# Altium PCB Pcb.PcbDoc
Units mm, origin at the board's own origin, x right, y up, seen from the top; angles counter-clockwise.
Board outline 90 x 90 mm, 2 copper layers (Top Layer, Bottom Layer); 37 components, 25 nets, 181 pads, 18 vias.
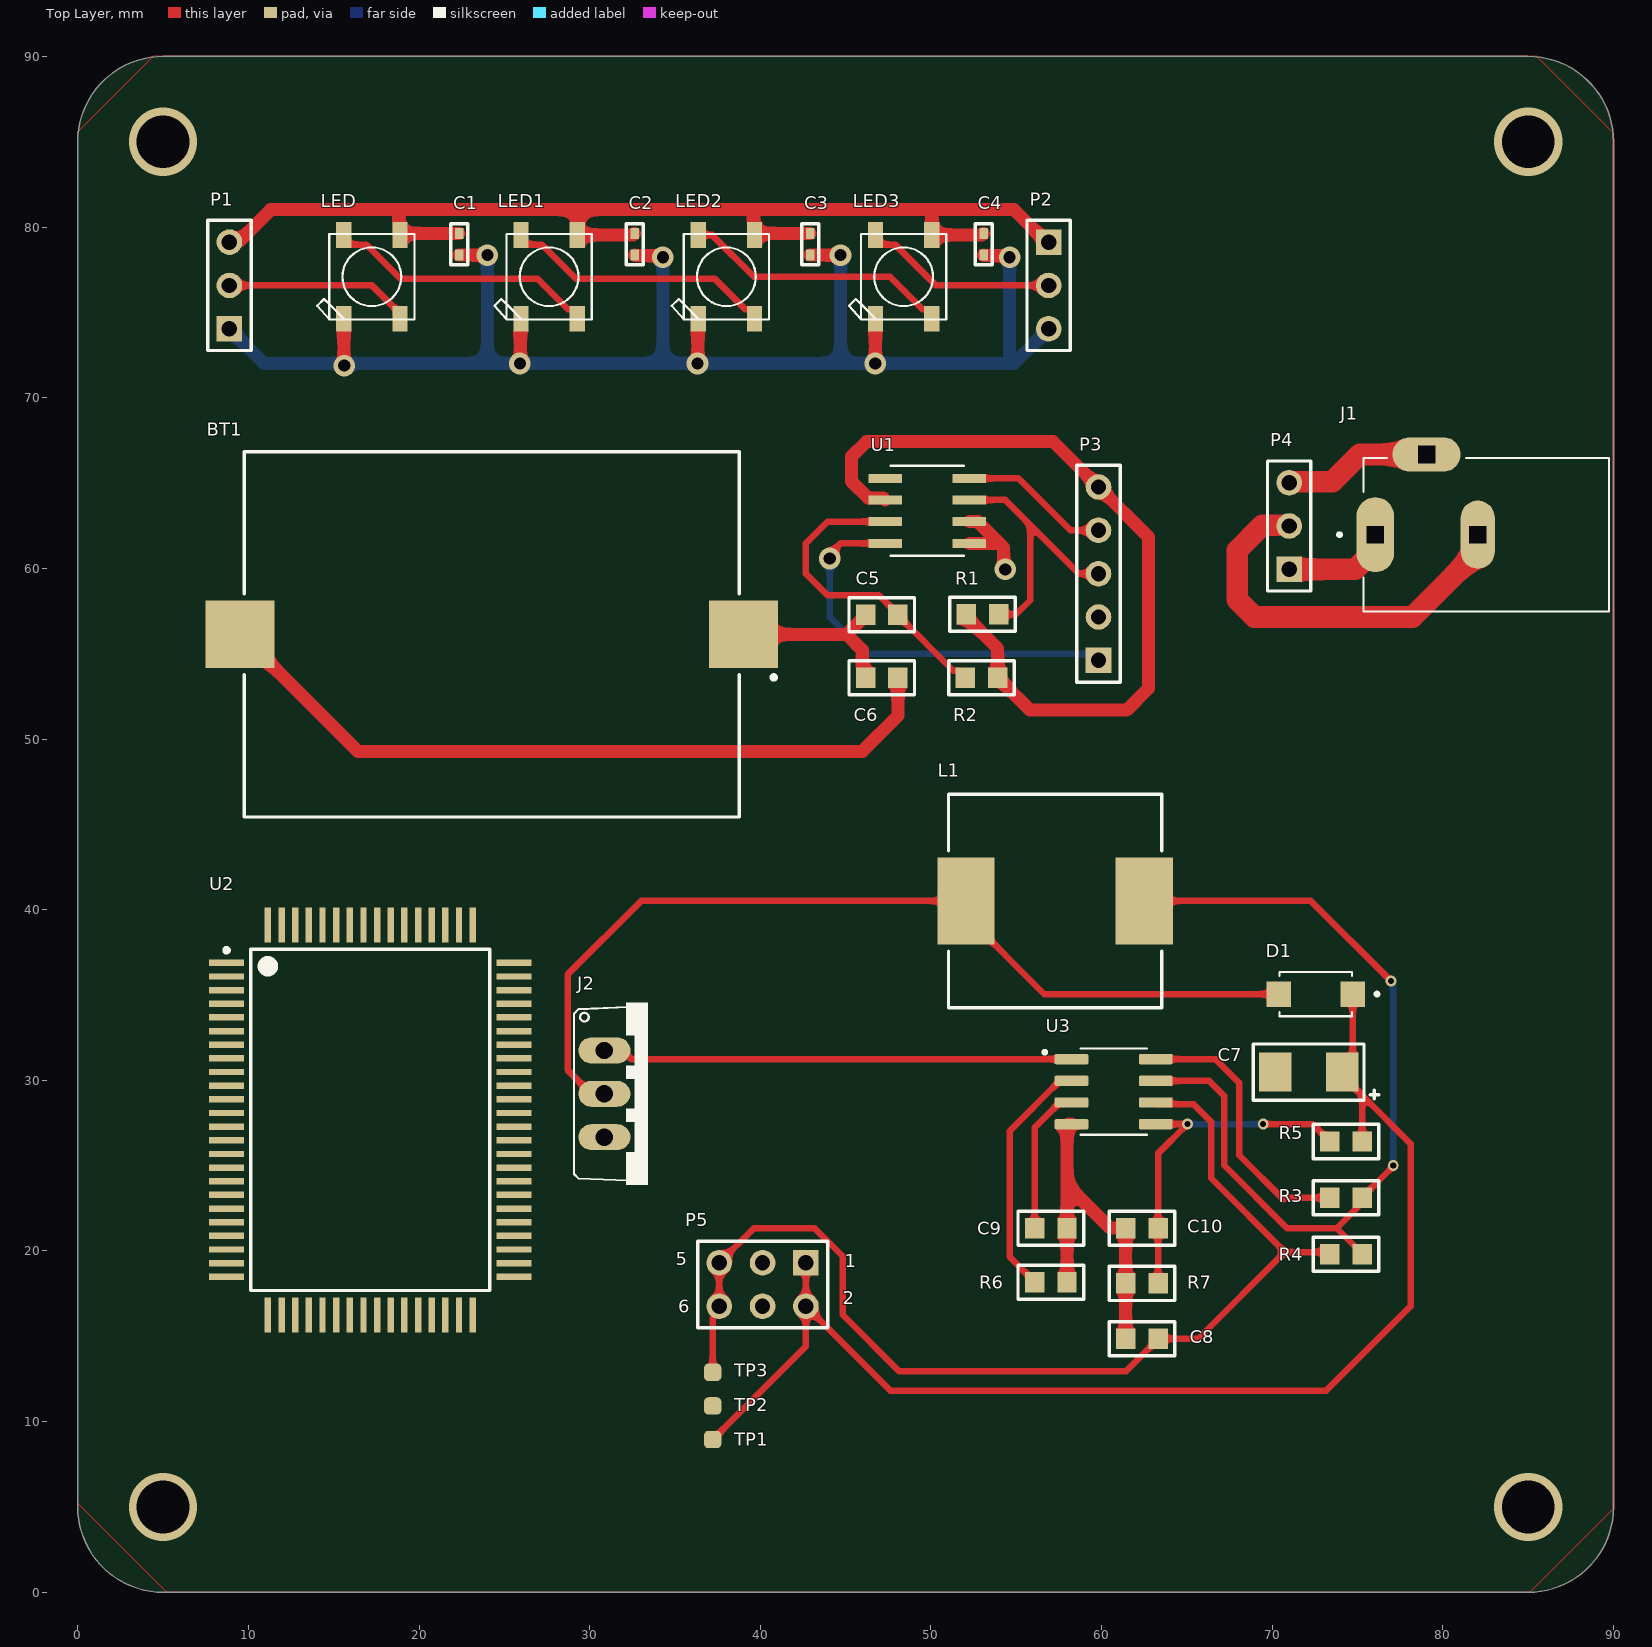
[diagram p0: Top Layer view]
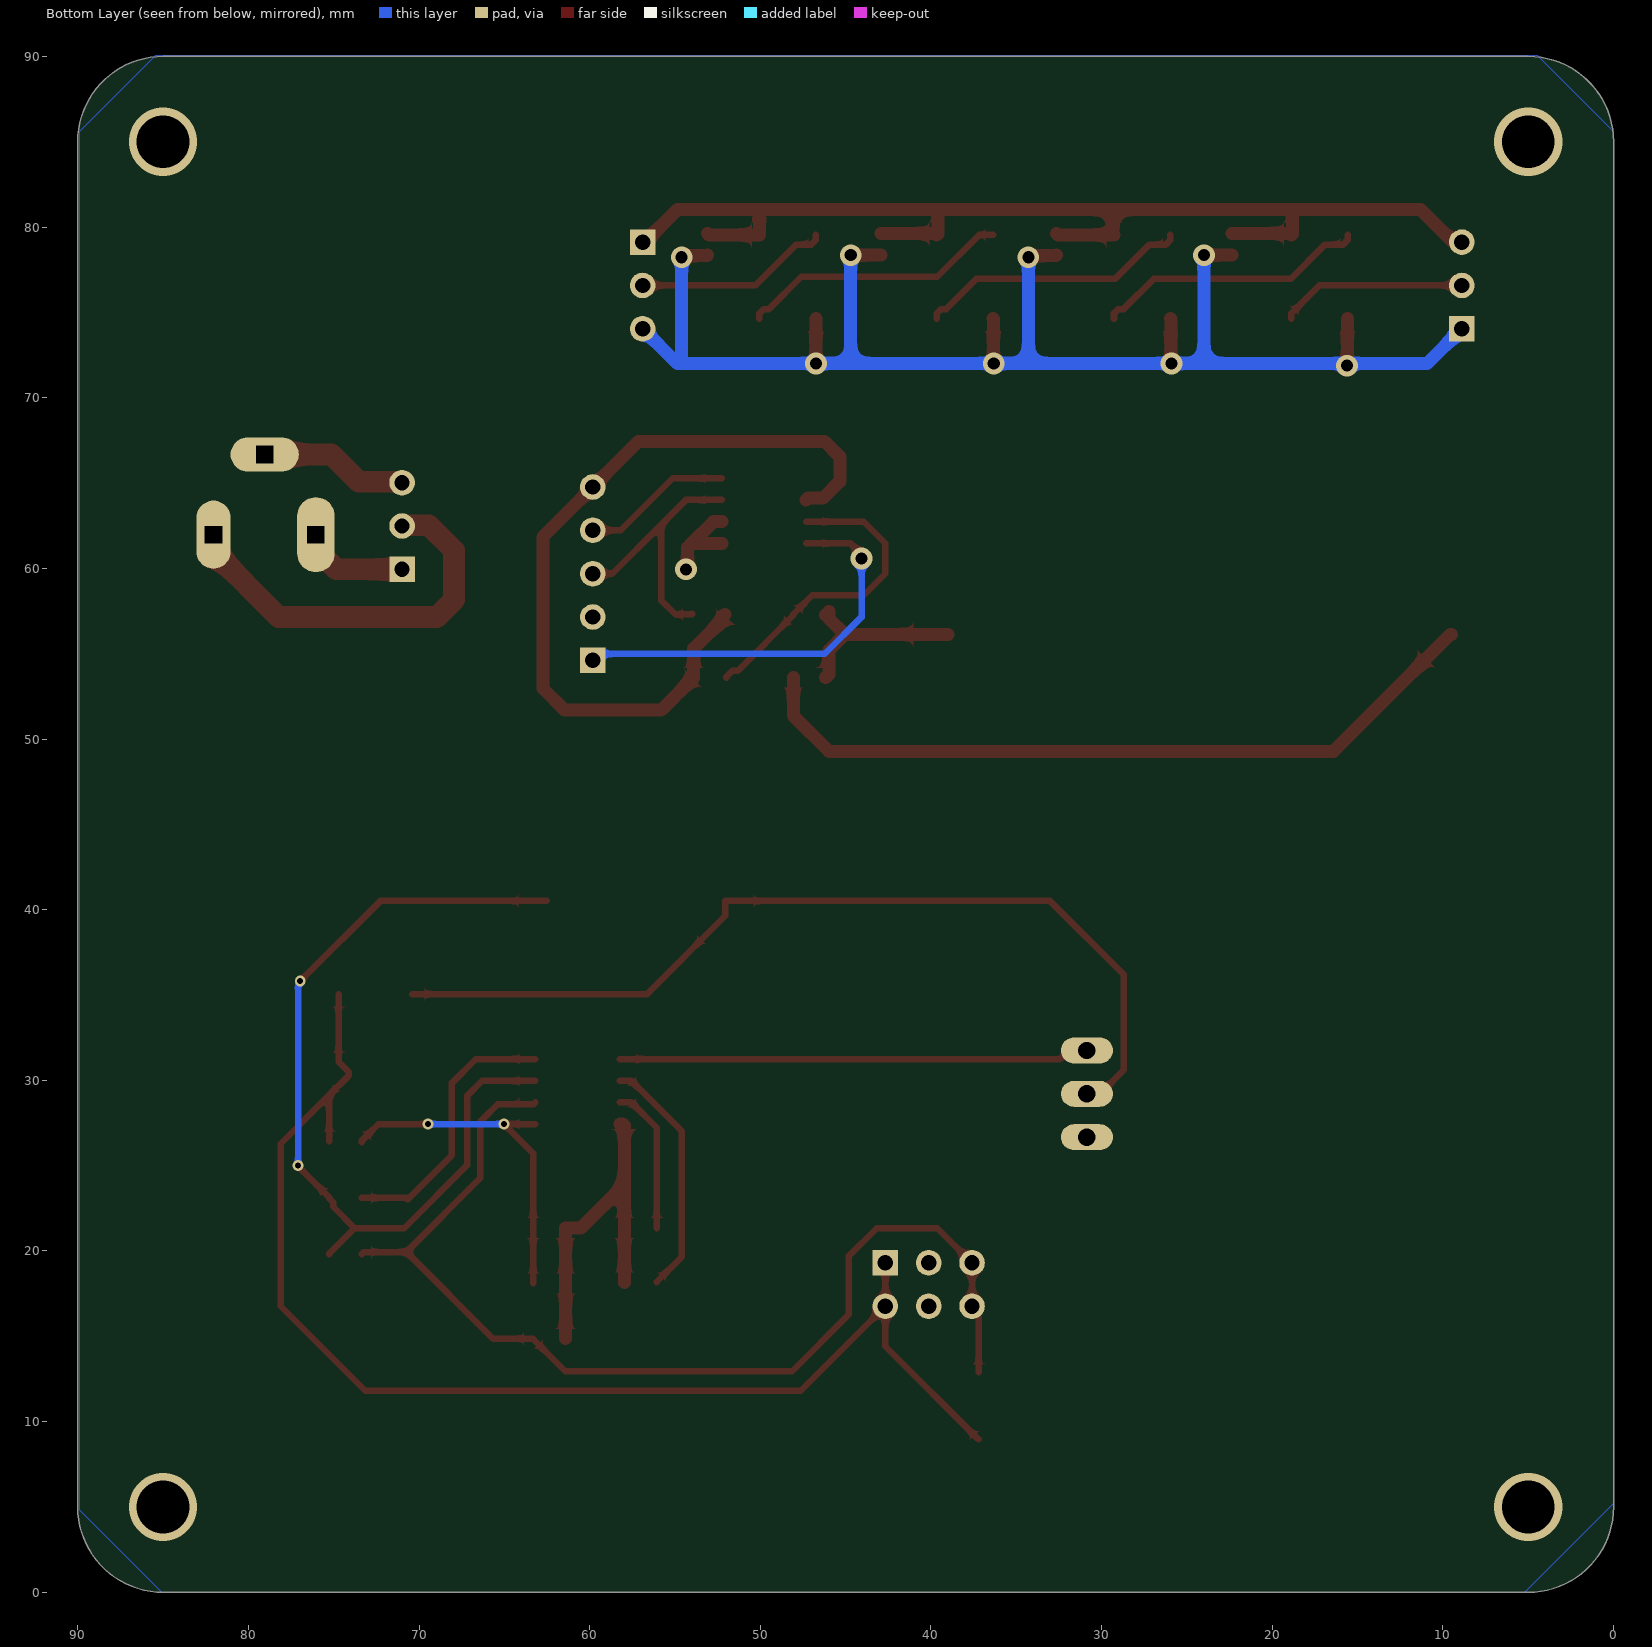
[diagram p1: Bottom Layer view, seen from below]

## Layer stack, top to bottom
Top Solder: solder mask 0.0102, Solder Resist, Dk 3.5
Top Layer: signal copper 0.0356
Dielectric 1: dielectric 0.32, FR-4, Dk 4.8
Bottom Layer: signal copper 0.0356
Bottom Solder: solder mask 0.0102, Solder Resist, Dk 3.5

## Board outline
0,5 0,85 cw(c5,85) 5,90 85,90 cw(c85,85) 90,85 90,5 cw(c85,5) 85,0 5,0 cw(c5,5)

## Design rules (kind name [scope] priority, off if disabled: settings)
Clearance [All] p1: gap=0.254 ignorepadtopadclearanceinfootprint=FALSE except(0: Arc-Hole Track-Hole SMDPad-Hole THPad-Hole Via-Hole Fill-Hole Poly-Hole Region-Hole Text-Hole)
PolygonConnect [All] p1: connectstyle=Relief reliefconductorwidth=0.254 reliefentries=4 polygonreliefangle="90 Angle" airgapwidth=0.254
RoutingVias [All] p1: holewidth=0.711 width=1.27 viastyle="Through Hole" minholewidth=0.356 minwidth=0.635 maxholewidth=4.5 maxwidth=5
SolderMaskExpansion [All] p1: expansion=0.102
Width [All] p1: maxlimit=2.54 minlimit=0.254 preferedwidth=0.254
30 further rules are at their usual default settings.

## Components (designator, comment, footprint, x,y, rotation, side; value= is the part's Value field where it differs from the comment)
BT1 "CR2032 BS-10" "CR2032 BS-10" 24.257,56.134 r180 top
C1 "Capacitor" 0402 22.352,78.994 r270 top
C2 "Capacitor" 0402 32.639,78.994 r270 top
C3 "Capacitor" 0402 42.926,78.994 r270 top
C4 "Capacitor" 0402 53.086,78.994 r270 top
C5 "104" 0805 47.117,57.277 r0 top
C6 "104" 0805 47.117,53.594 r180 top
C7 "4.7uF/250V" "1808 Polarized" 72.136,30.48 r180 top
C8 "100nF" 0805 62.357,14.859 r180 top
C9 "1nF" 0805 57.023,21.336 r180 top
C10 "100nF" 0805 62.357,21.336 r180 top
D1 "RS1MAL" SODFL5226X100N 72.553,35.052 r180 top
J1 "DC-005-5A-2.0" XKB_DC-005-5A-2.0 82.042,61.976 r180 top
J2 "IRF630" TO220V 33.401,29.21 r270 top
L1 "330uH" INDP125125X80N 57.277,40.513 r180 top
LED "WS2812B" WS2812B 17.235,77.089 r90 top
LED1 "WS2812B" WS2812B 27.624,77.089 r90 top
LED2 "WS2812B" WS2812B 38.012,77.089 r90 top
LED3 "WS2812B" WS2812B 48.401,77.089 r90 top
P1 "Header 3" HDR1X3 8.89,74.041 r90 top
P2 "Header 3" HDR1X3 56.896,79.121 r270 top
P3 "Header 5" HDR1X5 59.817,54.61 r90 top
P4 "Header 3" HDR1X3 70.993,59.944 r90 top
P5 "Header 3X2" HDR2X3 42.672,19.304 r180 top
R1 "10K" 0805 53.025,57.307 r180 top
R2 "10K" 0805 52.959,53.594 r0 top
R3 "100" 0805 74.318,23.114 r0 top
R4 "0.33" 0805 74.318,19.812 r0 top
R5 "1.1M" 0805 74.318,26.416 r180 top
R6 "330" 0805 57.023,18.161 r180 top
R7 "8.2K" 0805 62.357,18.098 r0 top
TP1 "" Test-Point-SMD 37.211,8.954 r90 top
TP2 "" Test-Point-SMD 37.211,10.922 r90 top
TP3 "" Test-Point-SMD 37.211,12.89 r90 top
U1 "DS3231MZVT" DS3231 49.784,63.373 r0 top
U2 "HV57708PG-G" HV57708 17.145,27.686 r0 top
U3 "MC34063ADR" MC34063ADR 60.706,29.337 r0 top

## Footprints (in the part's own frame and the unit in brackets; to place one, negate y for a bottom-side part, rotate by r counter-clockwise, add the part's x,y. Pads: shape width x height; smd on the part's side, far side on the other; paste and mask are expansions set on the pad)
0402 [mm]
  rect 0.635x0.5 smd: 1(-0.635,0) 2(0.635,0)
  silkscreen extent -1.2,-0.5 1.2,0.5, body extent -0.5,-0.25 0.5,0.25, height 0.32
0805 [mm]
  rect 1.14x1.2 smd: 1(-0.95,0) 2(0.95,0)
  silkscreen extent -1.92,-1 1.92,1, body extent -1,-0.6 1,0.6, height 0.45
"1808 Polarized" [mil]
  rect 75x90 smd: 1(-77.5,0) 2(77.5,0)
  silkscreen extent -162,-65 128,65
"CR2032 BS-10" [mm] "SODFL, 2-Leads, Body 21.44x33.00mm, IPC Medium Density"
  rect 4.05x3.95 smd: 1(-14.75,0) 2(14.75,0)
  silkscreen extent -16.65,-10.7 14.5,10.7, body extent -14.48,-10.72 14.48,10.72, height 5.1
DS3231 [mil]
  rect 78x21 smd: 1(-97,75) 2(-97,25) 3(-97,-25) 4(-97,-75) 5(97,-75) 6(97,-25) 7(97,25) 8(97,75)
  silkscreen extent -84,-104 84,104
HDR1X3 [mm] "Connector; Header; 3 Position"
  rect 1.5x1.5 hole 0.9: 1(0,0)
  round 1.5 hole 0.9: 2(2.54,0) 3(5.08,0)
  silkscreen extent -1.27,-1.27 6.35,1.27
HDR1X5 [mm] "Connector; Header; 5 Position"
  rect 1.5x1.5 hole 0.9: 1(0,0)
  round 1.5 hole 0.9: 2(2.54,0) 3(5.08,0) 4(7.62,0) 5(10.16,0)
  silkscreen extent -1.27,-1.27 11.43,1.27
HDR2X3 [mm] "Connector; Header; 3x2 Position"
  rect 1.5x1.5 hole 0.9: 1(0,0)
  round 1.5 hole 0.9: 2(0,2.54) 3(2.54,0) 4(2.54,2.54) 5(5.08,0) 6(5.08,2.54)
  silkscreen extent -1.27,-1.27 6.35,3.81
HV57708 [mm] "QFP, 80-Leads, Body 14.00x20.00mm, Pitch 0.80mm, IPC Medium Density"
  rect 2.05x0.375 smd: 1(-8.425,9.2) 2(-8.425,8.4) 3(-8.425,7.6) 4(-8.425,6.8) 5(-8.425,6) 6(-8.425,5.2) 7(-8.425,4.4) 8(-8.425,3.6) 9(-8.425,2.8) 10(-8.425,2) 11(-8.425,1.2) 12(-8.425,0.4) 13(-8.425,-0.4) 14(-8.425,-1.2) 15(-8.425,-2) 16(-8.425,-2.8) 17(-8.425,-3.6) 18(-8.425,-4.4) 19(-8.425,-5.2) 20(-8.425,-6) 21(-8.425,-6.8) 22(-8.425,-7.6) 23(-8.425,-8.4) 24(-8.425,-9.2) 41(8.425,-9.2) 42(8.425,-8.4) 43(8.425,-7.6) 44(8.425,-6.8) 45(8.425,-6) 46(8.425,-5.2) 47(8.425,-4.4) 48(8.425,-3.6) 49(8.425,-2.8) 50(8.425,-2) 51(8.425,-1.2) 52(8.425,-0.4) 53(8.425,0.4) 54(8.425,1.2) 55(8.425,2) 56(8.425,2.8) 57(8.425,3.6) 58(8.425,4.4) 59(8.425,5.2) 60(8.425,6) 61(8.425,6.8) 62(8.425,7.6) 63(8.425,8.4) 64(8.425,9.2)
  rect 0.375x2.05 smd: 25(-6,-11.425) 26(-5.2,-11.425) 27(-4.4,-11.425) 28(-3.6,-11.425) 29(-2.8,-11.425) 30(-2,-11.425) 31(-1.2,-11.425) 32(-0.4,-11.425) 33(0.4,-11.425) 34(1.2,-11.425) 35(2,-11.425) 36(2.8,-11.425) 37(3.6,-11.425) 38(4.4,-11.425) 39(5.2,-11.425) 40(6,-11.425) 65(6,11.425) 66(5.2,11.425) 67(4.4,11.425) 68(3.6,11.425) 69(2.8,11.425) 70(2,11.425) 71(1.2,11.425) 72(0.4,11.425) 73(-0.4,11.425) 74(-1.2,11.425) 75(-2,11.425) 76(-2.8,11.425) 77(-3.6,11.425) 78(-4.4,11.425) 79(-5.2,11.425) 80(-6,11.425)
  silkscreen extent -8.55,-10 7,10.06, body extent -7,-10 7,10, height 3.1
INDP125125X80N [mm] "Precision Wire Wound Inductor, 2-Leads, Body 12.50x12.50mm, IPC Medium Density"
  rect 3.35x5.1 smd: 1(-5.225,0) 2(5.225,0)
  silkscreen extent -6.25,-6.25 6.25,6.25, body extent -6.25,-6.25 6.25,6.25, height 8
MC34063ADR [mm]
  rrect25% 1.97x0.6 smd: 1(-2.47,1.905) 2(-2.47,0.635) 3(-2.47,-0.635) 4(-2.47,-1.905) 5(2.47,-1.905) 6(2.47,-0.635) 7(2.47,0.635) 8(2.47,1.905)
  silkscreen extent -4.14,-2.52 1.95,2.52
SODFL5226X100N [mm]
  rect 1.44x1.48 smd: 1(-2.165,0) 2(2.165,0)
  silkscreen extent -3.68,-1.3 2.12,1.3, body extent -2.6,-1.3 2.6,1.3, height 1
Test-Point-SMD [mil]
  rrect50% 40x40 smd: 1(0,0)
TO220V [mil]
  oval 60x120 hole 40: 1(-100,-100) 2(0,-100) 3(100,-100)
  silkscreen extent -210,-170 210,0, body extent -202,-88 202,88, height 750
WS2812B [mm]
  rect 1.5x0.9 smd: 1-VDD(2.45,-1.65) 2-DOUT(2.45,1.65) 3-GND(-2.45,1.65) 4-DIN(-2.45,-1.65)
  silkscreen extent -2.5,-2.5 2.5,3.2
XKB_DC-005-5A-2.0 [mm]
  oval 2.2x4.4 hole 1 square: 1(6,0)
  oval 2x4 hole 1 square: 2(0,0)
  oval 4x2 hole 1 square: 3(3,-4.7)
  silkscreen extent -7.7,-4.5 8.2,4.5

## Part data
C5 C6 C8 C9 C10: library part Capacitor
C7: library part CapacitorPolarized
D1: "1A, 200V - 1000V Fast Recovery Surface Mount Rectifier", Package="DO-221AC-2 Taiwan Semiconductor", Availability="In Stock", Check_prices=https://www.snapeda.com/parts/RS1MAL/Taiwan+Semiconductor/view-part/?ref=eda, MF="Taiwan Semiconductor", MP=RS1MAL, Price=None, Purchase-URL=https://pricing.snapeda.com/search?q=RS1MAL&ref=eda, SnapEDA_Link=https://www.snapeda.com/parts/RS1MAL/Taiwan+Semiconductor/view-part/?ref=snap
J1: "DC Power Receptacle Jack, Through Hole，Right Angle", Package=Package, Availability="Not in stock", Check_prices=https://www.snapeda.com/parts/DC-005-5A-2.0/XKB+Industrial+Precision/view-part/?ref=eda, MF="XKB Industrial Precision", MP=DC-005-5A-2.0, Price=None, SnapEDA_Link=https://www.snapeda.com/parts/DC-005-5A-2.0/XKB+Industrial+Precision/view-part/?ref=snap
J2: "N-Channel 200 V 9A (Tc) 30W (Tc) Through Hole TO-220FP", Package="TO-220 Vishay", Availability="In Stock", Check_prices=https://www.snapeda.com/parts/IRF630/STMicroelectronics/view-part/?ref=eda, MF=STMicroelectronics, MP=IRF630, Price=None, Purchase-URL=https://pricing.snapeda.com/search/part/IRF630/?ref=eda, SnapEDA_Link=https://www.snapeda.com/parts/IRF630/STMicroelectronics/view-part/?ref=snap
L1: library part Inductor
LED LED1 LED2 LED3: "Raspberry Pi HAT _40 pin_ Wheeled Robotics Kit", Package=None, Availability=Unavailable, MF="SparkFun Electronics", MP=WS2812B, Price=None, SnapEDA_Link=https://www.snapeda.com/parts/WS2812B/Worldsemi/view-part/1038297/?ref=snap
P1 P2 P4: "Header, 3-Pin", LatestRevisionDate=17-Jul-2002, LatestRevisionNote="Re-released for DXP Platform.", Publisher="Altium Limited"
P3: "Header, 5-Pin", LatestRevisionDate=17-Jul-2002, LatestRevisionNote="Re-released for DXP Platform.", Publisher="Altium Limited"
P5: "Header, 3-Pin, Dual row", LatestRevisionDate=17-Jul-2002, LatestRevisionNote="Re-released for DXP Platform.", Publisher="Altium Limited"
R1 R2 R3 R4 R5 R6 R7: library part Resistor
TP1 TP2 TP3: library part TestPoint
U1: "Real Time Clock _RTC_ IC Clock/Calendar I²C, 2-Wire Serial 8-SOIC _0.154, 3.90mm Width_", Package="SOIC-8 Maxim Integrated", Digi-Key_Part_Number=DS3231MZ/V+TTR-ND, Digi-Key_Purchase_URL=https://www.digikey.com/product-detail/en/maxim-integrated/DS3231MZ-V-T/DS3231MZ-V-TTR-ND/3440500?utm_source=snapeda&utm_medium=aggregator&utm_campaign=symbol, MF="Maxim Integrated", MP=DS3231MZ/V+T, SnapEDA_Link=https://www.snapeda.com/parts/DS3231MZ/V+T/Maxim%20Integrated/view-part/230018/?ref=snap
U2: "No Description Available", Mfr_Name=Microchip, RefDes=RefDes, Type=Type
U3: "1.5-A Boost/Buck/Inverting Switching Regulator 8-SOIC 0 to 70", Package=None, Availability=Unavailable, MP=MC34063ADR, Price=None

## Via types
v1: diameter 1.27, hole 0.711, Top Layer to Bottom Layer, 10 vias
v2: diameter 4, hole 3.1, Top Layer to Bottom Layer, 4 vias
v3: diameter 0.635, hole 0.356, Top Layer to Bottom Layer, 4 vias

## Nets (pads, with @x,y where several pads share a name; then routed paths per layer and width w, separated by ;. In a path a pad name is that pad's centre, name@x,y a point inside that pad or via, vN(x,y) a via of type N, cw(c..) or ccw(c..) an arc to the next point about the centre after c; other vN are vias at no path point)
DI: LED.4-DIN P1.2 | length 11
  Top Layer w0.381: P1.2 17.243,76.581 18.885,74.939 LED.4-DIN
DO: LED3.2-DOUT P2.2 | length 11.5
  Top Layer w0.381: LED3.2-DOUT 46.751,79.239 47.01,78.979 47.894,78.979 50.292,76.581 P2.2
GND: BT1.1 C1.2 C2.2 C3.2 C4.2 C5.1 C6.2 C7.2 C8.2 C9.1 C10.2 J2.3 LED1.3-GND LED2.3-GND LED3.3-GND LED.3-GND P1.1 P2.3 P3.2 P5.3 P5.4 R6.1 R7.1 TP2.1 U1.5 U1.6 U3.4 | length 129.6
  Top Layer w0.762: LED.3-GND 15.603,74.621 15.603,71.9 v1(15.621,71.882) ; C1.2 v1(24.003,78.359) ; v1(25.908,72.009) 25.941,72.042 25.941,74.606 LED1.3-GND ; C2.2 32.669,78.329 34.193,78.329 v1(34.29,78.232) ; v1(36.322,72.009) 36.342,72.029 36.342,74.619 LED2.3-GND ; BT1.1 45.054,56.134 ; C3.2 v1(44.704,78.359) ; C6.2 45.978,53.783 45.978,55.21 45.054,56.134 ; C5.1 45.978,57.466 45.978,57.058 45.054,56.134 ; v1(46.736,72.009) 46.743,72.016 46.743,74.632 LED3.3-GND ; U1.5 54.013,61.468 ; U1.6 52.743,62.738 54.013,61.468 ; C4.2 53.116,78.329 54.513,78.329 v1(54.61,78.232) ; v1(54.356,59.944) 54.259,60.041 54.259,61.222 54.013,61.468 ; R6.1 C9.1 57.973,23.876 ; U3.4 58.054,27.432 57.973,27.351 57.973,23.876 ; C8.2 R7.1 C10.2 60.513,21.336 57.973,23.876
  Bottom Layer w0.762: P1.1 10.922,72.009 24.003,72.009 ; v1(24.003,78.359) 24.003,72.009 ; v1(34.29,78.232) 34.29,72.009 ; v1(44.704,78.359) 44.704,72.009 ; v1(54.61,78.232) 54.61,72.263 54.864,72.009 ; P2.3 54.864,72.009 ; 24.003,72.009 v1(25.908,72.009) 34.29,72.009 ; 34.29,72.009 v1(36.322,72.009) 44.704,72.009 ; 44.704,72.009 v1(46.736,72.009) 54.864,72.009
NetBT1_2: BT1.2 C6.1 | length 44.5
  Top Layer w0.762: BT1.2 9.557,56.134 16.415,49.276 45.974,49.276 48.067,51.369 C6.1
NetC5_2: C5.2 R2.1 U1.3 | length 18.9
  Top Layer w0.381: U1.3 43.942,62.738 42.672,61.468 42.672,59.69 43.942,58.42 46.954,58.42 48.067,57.307 C5.2 48.067,57.247 51.31,54.004 51.63,54.004 52.009,53.624 R2.1
NetC9_2: C9.2 U3.3 | length 8.7
  Top Layer w0.381: C9.2 56.073,27.224 57.551,28.702 U3.3
NetC10_1: C10.1 R5.2 R7.2 U3.5 | length 20.7
  Top Layer w0.381: U3.5 v3(65.024,27.432) 63.307,25.715 C10.1 R7.2 ; v3(69.469,27.432) 72.382,27.432 73.368,26.446 R5.2 R5.2@73.368,26.386
  Bottom Layer w0.381: v3(65.024,27.432) v3(69.469,27.432)
NetD1_2: D1.2 J2.2 L1.2 | length 54.6
  Top Layer w0.381: J2.2 30.099,29.21 28.702,30.607 28.702,36.195 33.02,40.513 L1.2 52.052,39.638 56.638,35.052 D1.2
NetJ1_1: J1.1 P4.1 | length 6.4
  Top Layer w1.27: P4.1 74.858,59.944 76.042,61.128 J1.1
NetJ1_2: J1.2 P4.2 | length 23.7
  Top Layer w1.27: P4.2 70.949,62.528 69.425,62.528 67.945,61.048 67.945,58.166 68.961,57.15 78.216,57.15 82.042,60.976 J1.2
NetJ1_3: J1.3 P4.3 | length 8.7
  Top Layer w1.27: P4.3 71.037,65.068 73.529,65.068 75.137,66.676 J1.3
NetJ2_1: J2.1 U3.1 | length 27.6
  Top Layer w0.381: J2.1 31.932,31.75 32.44,31.242 U3.1
NetL1_1: L1.1 R3.2 R4.2 U3.7 | length 50.8
  Top Layer w0.381: L1.1 72.263,40.513 v3@76.835,35.941 ; U3.7 66.294,29.972 67.183,29.083 67.183,25.019 70.866,21.336 73.774,21.336 ; R4.2 75.268,19.842 73.774,21.336 ; v3(77.089,25.019) 77.089,24.965 75.268,23.144 R3.2 75.268,23.084 75.028,22.844 75.028,22.59 73.774,21.336
  Bottom Layer w0.381: v3(76.962,35.814) 77.089,35.687 v3(77.089,25.019)
NetLED1_2-DOUT: LED1.2-DOUT LED2.4-DIN | length 16.1
  Top Layer w0.381: LED1.2-DOUT 25.974,79.239 26.233,78.979 27.193,78.979 29.21,76.962 37.339,76.962 39.103,75.199 39.403,75.199 39.662,74.939 LED2.4-DIN
NetLED1_4-DIN: LED1.4-DIN LED.2-DOUT | length 16.1
  Top Layer w0.381: LED.2-DOUT 15.585,79.239 15.845,78.979 16.906,78.979 18.923,76.962 26.951,76.962 28.714,75.199 29.014,75.199 29.274,74.939 LED1.4-DIN
NetLED2_2-DOUT: LED2.2-DOUT LED3.4-DIN | length 15.9
  Top Layer w0.381: LED2.2-DOUT 37.174,79.539 39.624,77.089 47.601,77.089 49.491,75.199 49.791,75.199 50.051,74.939 LED3.4-DIN
NetR3_1: R3.1 U3.8 | length 16.1
  Top Layer w0.381: U3.8 66.675,31.242 68.072,29.845 68.072,25.603 70.657,23.018 70.753,23.114 R3.1
NetR6_2: R6.2 U3.2 | length 14.3
  Top Layer w0.381: R6.2 56.073,18.191 54.61,19.654 54.61,27.031 57.551,29.972 U3.2
RST: P3.1 U1.4 | length 24
  Top Layer w0.381: v1(44.069,60.579) 44.069,60.833 44.704,61.468 U1.4
  Bottom Layer w0.381: v1(44.069,60.579) 44.069,57.15 46.228,54.991 59.436,54.991 P3.1
SCL: P3.4 U1.8 | length 8.8
  Top Layer w0.381: U1.8 55.127,65.278 58.175,62.23 P3.4
SDA: P3.3 R1.1 U1.7 | length 16
  Top Layer w0.381: U1.7 54.356,64.008 55.816,62.547 ; R1.1@53.975,57.337 R1.1 54.985,57.307 55.816,58.139 55.816,62.547 ; P3.3 58.674,59.69 55.816,62.547
V3.3: P3.5 R1.2 R2.2 U1.2 | length 47.5
  Top Layer w0.762: U1.2 47.206,64.122 46.321,64.122 45.339,65.104 45.339,66.548 46.228,67.437 57.15,67.437 P3.5 62.738,61.849 62.738,52.959 61.468,51.689 55.814,51.689 54.128,53.375 54.098,53.375 53.909,53.564 R2.2 53.909,55.305 52.264,56.95 52.264,57.118 R1.2
VCC: C1.1 C2.1 C3.1 C4.1 LED1.1-VDD LED2.1-VDD LED3.1-VDD LED.1-VDD P1.3 P2.1 | length 68.9
  Top Layer w0.762: P1.3 9.398,79.121 11.303,81.026 18.669,81.026 ; C1.1 18.954,79.629 18.885,79.56 LED.1-VDD 18.816,79.608 18.816,80.879 18.669,81.026 ; C2.1 32.549,79.539 LED1.1-VDD 29.337,79.602 29.337,81.026 ; C3.1 39.731,79.629 39.662,79.56 LED2.1-VDD 39.593,79.608 39.593,80.93 39.497,81.026 ; C4.1 52.996,79.539 LED3.1-VDD 50.051,81.013 50.038,81.026 ; P2.1@56.769,79.121 54.864,81.026 50.038,81.026 ; 18.669,81.026 29.337,81.026 ; 29.337,81.026 39.497,81.026 ; 39.497,81.026 50.038,81.026
VCC12: C8.1 P5.5 P5.6 R4.1 TP3.1 U3.6 | length 64.8
  Top Layer w0.381: TP3.1 37.211,16.08 37.592,16.461 P5.6 P5.5 39.624,21.336 43.18,21.336 44.831,19.685 44.831,16.256 48.133,12.954 61.432,12.954 63.307,14.829 C8.1 65.659,14.859 70.739,19.939 ; U3.6 63.285,28.593 65.387,28.593 65.468,28.511 65.471,28.511 66.103,27.879 66.103,27.877 66.421,27.559 66.421,24.257 70.739,19.939 ; R4.1 73.241,19.939 70.739,19.939
VH: C7.1 D1.1 P5.1 P5.2 R5.1 TP1.1 | length 75.1
  Top Layer w0.381: TP1.1 42.672,14.414 P5.2 ; P5.1 P5.2 ; D1.1 74.718,31.094 C7.1 74.105,30.29 75.268,29.126 ; R5.1 75.268,29.126 ; P5.2 47.625,11.811 73.152,11.811 78.105,16.764 78.105,26.289 75.268,29.126
pads on no net: U1.1 U2.1 U2.2 U2.3 U2.4 U2.5 U2.6 U2.7 U2.8 U2.9 U2.10 U2.11 U2.12 U2.13 U2.14 U2.15 U2.16 U2.17 U2.18 U2.19 U2.20 U2.21 U2.22 U2.23 U2.24 U2.25 U2.26 U2.27 U2.28 U2.29 U2.30 U2.31 U2.32 U2.33 U2.34 U2.35 U2.36 U2.37 U2.38 U2.39 U2.40 U2.41 U2.42 U2.43 U2.44 U2.45 U2.46 U2.47 U2.48 U2.49 U2.50 U2.51 U2.52 U2.53 U2.54 U2.55 U2.56 U2.57 U2.58 U2.59 U2.60 U2.61 U2.62 U2.63 U2.64 U2.65 U2.66 U2.67 U2.68 U2.69 U2.70 U2.71 U2.72 U2.73 U2.74 U2.75 U2.76 U2.77 U2.78 U2.79 U2.80
copper on no net:
  other v2: 5,5 85,5 5,85 85,85

## Polygon pours and split planes (outlines as drawn)
GND on Top Layer "Top Layer-No Net" (solid, shelved, pour order 4): 4.445,90.043 85.471,90.043 89.916,85.598 89.916,4.826 85.09,0 5.207,0 0,5.207 0,85.598
GND on Bottom Layer "Bottom Layer-No Net" (solid, shelved, pour order 2): 4.445,90.043 85.471,90.043 89.916,85.598 89.916,4.826 85.09,0 5.207,0 0,5.207 0,85.598

## Silkscreen, mask and mechanical layers (free items; w line width, h text height)
Mechanical 1:
  the board outline again, w0.254

## Text inside footprints (layer, text, board x,y; h text height)
J2: Mechanical 13 "1" at 30.226,32.385 h1.27 r270; Mechanical 13 "2" at 30.226,29.845 h1.27 r270; Mechanical 13 "3" at 30.226,27.305 h1.27 r270
P5: Top Overlay "1" at 44.958,19.05 h0.76; Top Overlay "2" at 44.831,16.891 h0.76; Top Overlay "5" at 35.052,19.177 h0.76; Top Overlay "6" at 35.179,16.383 h0.76